# Altium PCB KUOZHAN.PCBDOC (part 7 of 21)
Units mm, origin at the board's own origin, x right, y up, seen from the top; angles counter-clockwise.
Board outline 165.51 x 116.38 mm, 2 copper layers (Top Layer, Bottom Layer); 171 components, 245 nets, 894 pads, 298 vias.
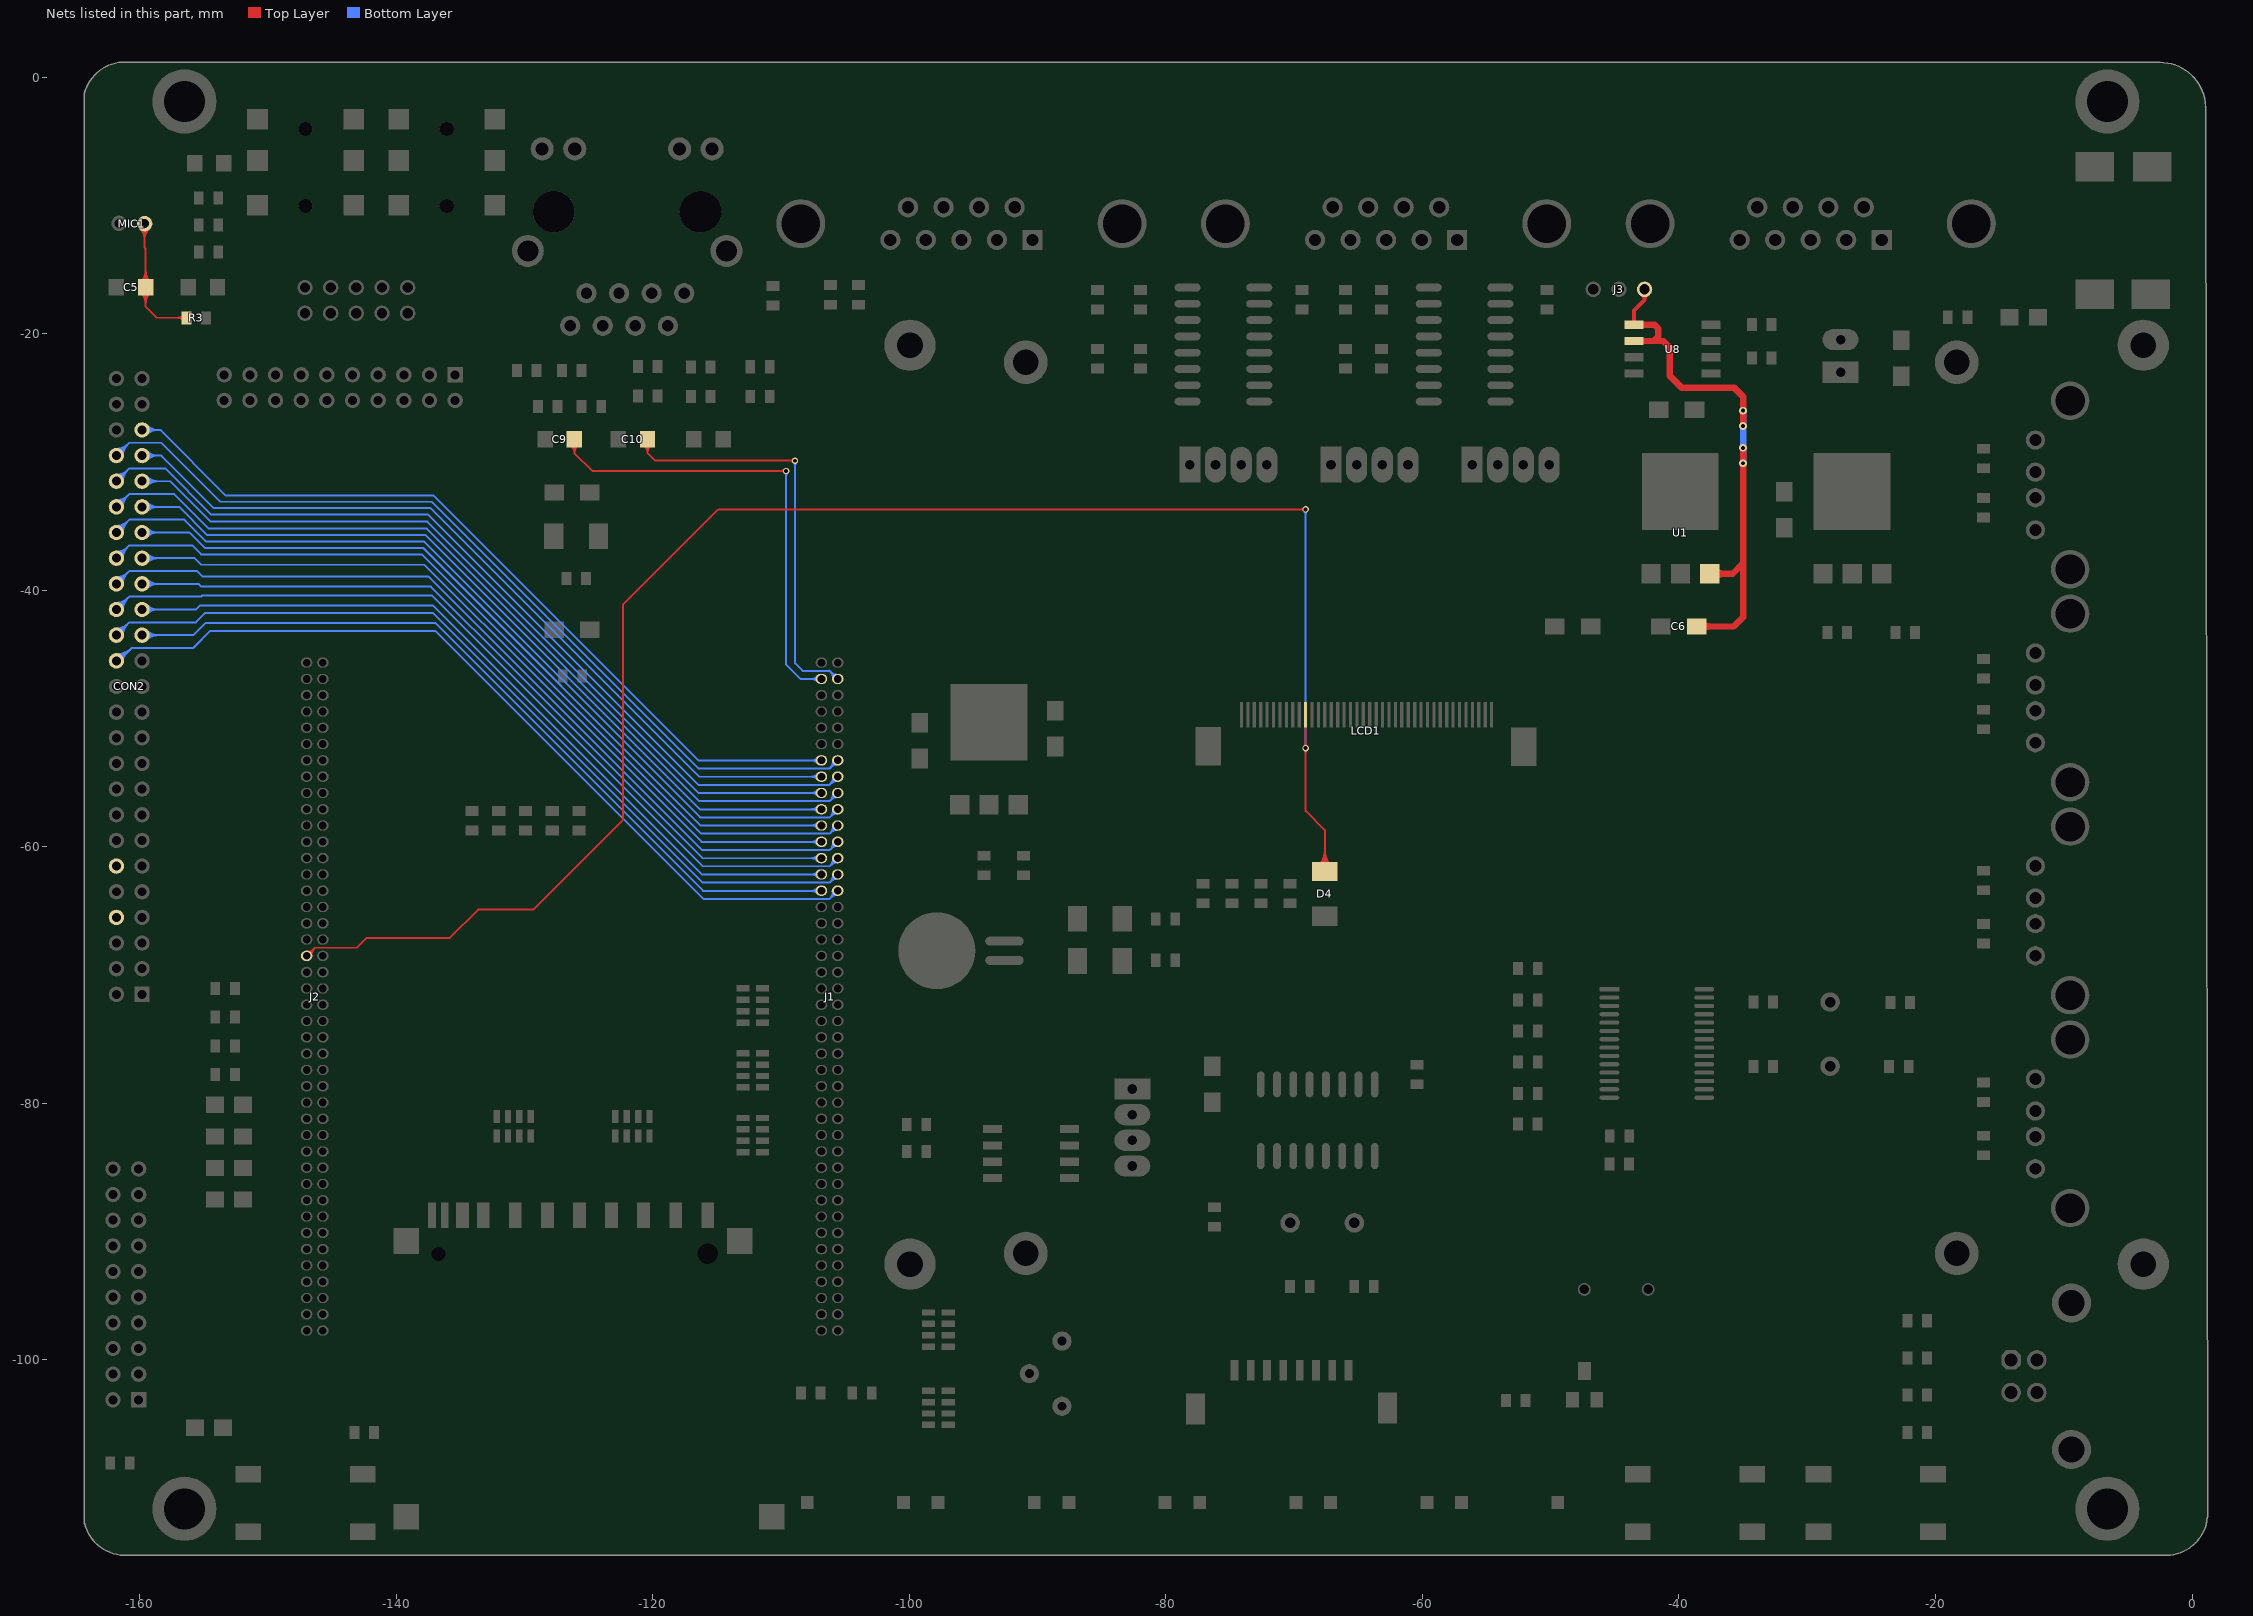
[diagram p7: the nets of this part, all layers, seen from the top]

## Via types
v1: diameter 0.5, hole 0.3, Top Layer to Bottom Layer, 272 vias
v2: diameter 0.6, hole 0.3, Top Layer to Bottom Layer, 24 vias
v3: diameter 0.9, hole 0.9, Top Layer to Bottom Layer, 2 vias

## Nets (pads, with @x,y where several pads share a name; then routed paths per layer and width w, separated by ;. In a path a pad name is that pad's centre, name@x,y a point inside that pad or via, vN(x,y) a via of type N, cw(c..) or ccw(c..) an arc to the next point about the centre after c; other vN are vias at no path point) (continued)
LCD_PWR: D4.1 J2.37 LCD1.30 | length 161.7
  Top Layer w0.15: J2.37@-146.973,-68.514 -146.327,-67.868 -143.068,-67.868 -142.3,-67.1 -135.8,-67.1 -133.6,-64.9 -129.3,-64.9 -122.3,-57.9 -122.3,-41.1 -114.9,-33.7 v1(-69.1,-33.7) ; v1@-69.224,-52.424 cw(c-69.522,-52.722) -69.1,-52.722 cw(c-68.678,-52.722) v1@-68.976,-52.424 ; v1@-69.188,-52.212 ccw(c-69.402,-51.998) -69.1,-51.998 ccw(c-68.798,-51.998) v1@-69.012,-52.212 ; v1@-69.188,-33.788 ccw(c-69.402,-34.002) -69.402,-33.7 ccw(c-69.402,-33.398) v1@-69.188,-33.612 ; LCD1.30@-69.1,-49.7 v1(-69.1,-52.3) -69.1,-57.2 -67.599,-58.701 D4.1@-67.599,-61.915 ; D4.1@-68.077,-61.437 ccw(c-69.229,-60.285) -67.599,-60.285 ccw(c-65.97,-60.285) D4.1@-67.122,-61.437 ; D4.1@-67.971,-61.543 ccw(c-68.867,-60.647) -67.599,-60.647 ccw(c-66.332,-60.647) D4.1@-67.228,-61.543 ; D4.1@-67.865,-61.649 ccw(c-68.505,-61.009) -67.599,-61.009 ccw(c-66.694,-61.009) D4.1@-67.334,-61.649 ; J2.37@-146.973,-68.339 ccw(c-146.973,-67.917) J2.37@-146.674,-68.215 ; J2.37@-146.973,-68.339 ccw(c-146.973,-67.917) J2.37@-146.674,-68.215 ; J2.37@-146.973,-68.339 ccw(c-146.973,-67.917) J2.37@-146.674,-68.215 ; J2.37@-146.973,-68.189 ccw(c-146.973,-67.405) -146.418,-67.959 ; J2.37@-146.973,-68.189 ccw(c-146.973,-67.405) -146.418,-67.959 ; J2.37@-146.973,-68.189 ccw(c-146.973,-67.405) -146.418,-67.959 ; J2.37@-146.798,-68.514 cw(c-146.375,-68.514) J2.37@-146.674,-68.215 ; J2.37@-146.798,-68.514 cw(c-146.375,-68.514) J2.37@-146.674,-68.215 ; J2.37@-146.798,-68.514 cw(c-146.375,-68.514) J2.37@-146.674,-68.215 ; J2.37@-146.648,-68.514 cw(c-145.863,-68.514) -146.418,-67.959 ; J2.37@-146.648,-68.514 cw(c-145.863,-68.514) -146.418,-67.959 ; J2.37@-146.648,-68.514 cw(c-145.863,-68.514) -146.418,-67.959 ; -69.522,-33.7 cw(c-69.522,-34.122) v1@-69.224,-33.824 ; -69.522,-33.7 ccw(c-69.522,-33.278) v1@-69.224,-33.576 ; -69.522,-33.7 cw(c-69.522,-34.122) v1@-69.224,-33.824 ; -69.522,-33.7 ccw(c-69.522,-33.278) v1@-69.224,-33.576 ; -69.522,-33.7 cw(c-69.522,-34.122) v1@-69.224,-33.824 ; -69.522,-33.7 ccw(c-69.522,-33.278) v1@-69.224,-33.576 ; -69.522,-33.7 ccw(c-69.522,-33.278) v1@-69.224,-33.576 ; -69.522,-33.7 cw(c-69.522,-34.122) v1@-69.224,-33.824 ; v1@-69.224,-52.176 ccw(c-69.522,-51.878) -69.1,-51.878 ; v1@-69.224,-52.176 ccw(c-69.522,-51.878) -69.1,-51.878 ; v1@-69.224,-52.176 ccw(c-69.522,-51.878) -69.1,-51.878 ; v1@-69.224,-52.176 ccw(c-69.522,-51.878) -69.1,-51.878 ; -69.1,-51.878 ccw(c-68.678,-51.878) v1@-68.976,-52.176 ; -69.1,-51.878 ccw(c-68.678,-51.878) v1@-68.976,-52.176 ; -69.1,-51.878 ccw(c-68.678,-51.878) v1@-68.976,-52.176 ; -69.1,-51.878 ccw(c-68.678,-51.878) v1@-68.976,-52.176 ; J2.37@-146.923,-68.174 ccw(c-146.923,-67.475) -146.428,-67.969 cw(c-146.923,-67.475) J2.37@-146.923,-68.174 ; J2.37@-146.748,-68.499 cw(c-146.24,-68.499) -146.599,-68.141 ccw(c-146.24,-68.499) J2.37@-146.748,-68.499 ; J2.37@-146.598,-68.499 cw(c-145.728,-68.499) -146.343,-67.885 ccw(c-145.728,-68.499) J2.37@-146.598,-68.499
  Bottom Layer w0.15: v1@-69.188,-52.212 ccw(c-69.402,-51.998) -69.1,-51.998 ccw(c-68.798,-51.998) v1@-69.012,-52.212 ; v1@-69.188,-33.788 cw(c-69.402,-34.002) -69.1,-34.002 cw(c-68.798,-34.002) v1@-69.012,-33.788 ; v1(-69.1,-52.3) v1(-69.1,-33.7) ; v1@-69.224,-52.176 ccw(c-69.522,-51.878) -69.1,-51.878 ; v1@-69.224,-52.176 ccw(c-69.522,-51.878) -69.1,-51.878 ; v1@-69.224,-52.176 ccw(c-69.522,-51.878) -69.1,-51.878 ; v1@-69.224,-52.176 ccw(c-69.522,-51.878) -69.1,-51.878 ; v1@-69.224,-33.824 cw(c-69.522,-34.122) -69.1,-34.122 ; v1@-69.224,-33.824 cw(c-69.522,-34.122) -69.1,-34.122 ; v1@-69.224,-33.824 cw(c-69.522,-34.122) -69.1,-34.122 ; v1@-69.224,-33.824 cw(c-69.522,-34.122) -69.1,-34.122 ; -69.1,-51.878 ccw(c-68.678,-51.878) v1@-68.976,-52.176 ; -69.1,-51.878 ccw(c-68.678,-51.878) v1@-68.976,-52.176 ; -69.1,-51.878 ccw(c-68.678,-51.878) v1@-68.976,-52.176 ; -69.1,-51.878 ccw(c-68.678,-51.878) v1@-68.976,-52.176 ; -69.1,-34.122 cw(c-68.678,-34.122) v1@-68.976,-33.824 ; -69.1,-34.122 cw(c-68.678,-34.122) v1@-68.976,-33.824 ; -69.1,-34.122 cw(c-68.678,-34.122) v1@-68.976,-33.824 ; -69.1,-34.122 cw(c-68.678,-34.122) v1@-68.976,-33.824
LCD_VDD5V: C6.1 J3.3 U1.1 U8.5 U8.6 | length 69.6
  Top Layer w0.3: U8.5@-43.498,-19.302 -43.498,-18.198 -42.677,-17.377 ; J3.3@-42.677,-16.545 -42.677,-17.377 ; U8.5@-43.617,-19.183 ccw(c-43.903,-18.897) -43.498,-18.897 ; U8.5@-43.617,-19.183 ccw(c-43.903,-18.897) -43.498,-18.897 ; U8.5@-43.617,-19.183 ccw(c-43.903,-18.897) -43.498,-18.897 ; U8.5@-43.617,-19.183 ccw(c-43.903,-18.897) -43.498,-18.897 ; U8.5@-43.617,-19.183 ccw(c-43.903,-18.897) -43.498,-18.897 ; -43.498,-18.897 ccw(c-43.094,-18.897) U8.5@-43.38,-19.183 ; -43.498,-18.897 ccw(c-43.094,-18.897) U8.5@-43.38,-19.183 ; -43.498,-18.897 ccw(c-43.094,-18.897) U8.5@-43.38,-19.183 ; -43.498,-18.897 ccw(c-43.094,-18.897) U8.5@-43.38,-19.183 ; -43.498,-18.897 ccw(c-43.094,-18.897) U8.5@-43.38,-19.183 ; J3.3@-42.923,-16.922 cw(c-43.219,-17.377) -42.677,-17.377 ; J3.3@-42.923,-16.922 cw(c-43.219,-17.377) -42.677,-17.377 ; J3.3@-42.923,-16.922 cw(c-43.219,-17.377) -42.677,-17.377 ; J3.3@-42.923,-16.922 cw(c-43.219,-17.377) -42.677,-17.377 ; J3.3@-42.923,-16.922 cw(c-43.219,-17.377) -42.677,-17.377 ; -42.677,-17.377 cw(c-42.134,-17.377) J3.3@-42.431,-16.922 ; -42.677,-17.377 cw(c-42.134,-17.377) J3.3@-42.431,-16.922 ; -42.677,-17.377 cw(c-42.134,-17.377) J3.3@-42.431,-16.922 ; -42.677,-17.377 cw(c-42.134,-17.377) J3.3@-42.431,-16.922 ; -42.677,-17.377 cw(c-42.134,-17.377) J3.3@-42.431,-16.922
  Top Layer w0.5: U8.6@-43.498,-20.572 -41.972,-20.572 ; U8.5@-43.498,-19.302 -41.898,-19.302 -41.6,-19.6 -41.6,-20.2 -41.972,-20.572 ; C6.1@-38.62,-42.821 -35.721,-42.821 -35,-42.1 -35,-37.9 ; U1.1@-37.597,-38.712 -35.812,-38.712 -35,-37.9 ; v2(-35,-28.9) v2(-35,-30.1) -35,-37.9 ; v2(-35,-27.2) v2(-35,-26) -35,-24.9 -35.7,-24.2 -39.8,-24.2 -40.7,-23.3 -40.7,-21.1 -41.228,-20.572 -41.972,-20.572 ; C6.1@-38.221,-43.093 cw(c-37.564,-43.75) -37.564,-42.821 ; C6.1@-38.221,-43.093 cw(c-37.564,-43.75) -37.564,-42.821 ; C6.1@-38.221,-43.093 cw(c-37.564,-43.75) -37.564,-42.821 ; C6.1@-38.221,-43.093 cw(c-37.564,-43.75) -37.564,-42.821 ; C6.1@-38.221,-43.093 cw(c-37.564,-43.75) -37.564,-42.821 ; C6.1@-38.221,-42.549 ccw(c-37.564,-41.891) -37.564,-42.821 ; C6.1@-38.221,-42.549 ccw(c-37.564,-41.891) -37.564,-42.821 ; C6.1@-38.221,-42.549 ccw(c-37.564,-41.891) -37.564,-42.821 ; C6.1@-38.221,-42.549 ccw(c-37.564,-41.891) -37.564,-42.821 ; C6.1@-38.221,-42.549 ccw(c-37.564,-41.891) -37.564,-42.821 ; U1.1@-37.243,-39.066 cw(c-36.39,-39.919) -36.39,-38.712 ; U1.1@-37.243,-39.066 cw(c-36.39,-39.919) -36.39,-38.712 ; U1.1@-37.243,-39.066 cw(c-36.39,-39.919) -36.39,-38.712 ; U1.1@-37.243,-39.066 cw(c-36.39,-39.919) -36.39,-38.712 ; U1.1@-37.243,-39.066 cw(c-36.39,-39.919) -36.39,-38.712 ; U1.1@-37.243,-38.358 ccw(c-36.39,-37.505) -36.39,-38.712 ; U1.1@-37.243,-38.358 ccw(c-36.39,-37.505) -36.39,-38.712 ; U1.1@-37.243,-38.358 ccw(c-36.39,-37.505) -36.39,-38.712 ; U1.1@-37.243,-38.358 ccw(c-36.39,-37.505) -36.39,-38.712 ; U1.1@-37.243,-38.358 ccw(c-36.39,-37.505) -36.39,-38.712
  Bottom Layer w0.5: v2(-35,-30.1) v2(-35,-28.9) v2(-35,-27.2) v2(-35,-26)
LDATA0: CON2.42 J1.16 | length 83.6
  Bottom Layer w0.15: CON2.42@-161.8,-31.5 -160.8,-30.5 -158,-30.5 -154.4,-34.1 -137.5,-34.1 -116.42,-55.18 ; CON2.42@-161.8,-31.125 ccw(c-161.8,-30.22) -161.16,-30.86 ccw(c-160.52,-31.5) CON2.42@-161.425,-31.5 ; CON2.42@-161.8,-30.975 ccw(c-161.8,-29.708) -160.904,-30.604 ccw(c-160.008,-31.5) CON2.42@-161.275,-31.5 ; -116.414,-55.174 -106.216,-55.174 J1.16@-105.571,-54.529 ; -106.217,-55.18 J1.16@-105.571,-54.535 ; -106.126,-55.089 cw(c-105.571,-55.644) J1.16@-105.571,-54.86 ; -106.126,-55.089 ccw(c-106.68,-54.535) J1.16@-105.896,-54.535 ; -106.126,-55.089 cw(c-105.571,-55.644) J1.16@-105.571,-54.86 ; -106.126,-55.089 ccw(c-106.68,-54.535) J1.16@-105.896,-54.535 ; -106.126,-55.089 cw(c-105.571,-55.644) J1.16@-105.571,-54.86 ; -106.126,-55.089 ccw(c-106.68,-54.535) J1.16@-105.896,-54.535 ; J1.16@-105.87,-54.833 cw(c-105.571,-55.132) J1.16@-105.571,-54.71 ; J1.16@-105.87,-54.833 ccw(c-106.168,-54.535) J1.16@-105.746,-54.535 ; J1.16@-105.87,-54.833 cw(c-105.571,-55.132) J1.16@-105.571,-54.71 ; J1.16@-105.87,-54.833 ccw(c-106.168,-54.535) J1.16@-105.746,-54.535 ; J1.16@-105.87,-54.833 cw(c-105.571,-55.132) J1.16@-105.571,-54.71 ; J1.16@-105.87,-54.833 ccw(c-106.168,-54.535) J1.16@-105.746,-54.535 ; J1.16@-105.796,-54.535 cw(c-106.301,-54.55) -105.944,-54.907 ccw(c-106.301,-54.55) J1.16@-105.796,-54.535 ; J1.16@-105.796,-54.534 cw(c-106.299,-54.546) -105.943,-54.902 ccw(c-106.299,-54.546) J1.16@-105.796,-54.534 ; J1.16@-105.621,-54.854 ccw(c-105.621,-55.506) -106.081,-55.045 cw(c-105.621,-55.506) J1.16@-105.621,-54.854 ; J1.16@-105.621,-54.854 ccw(c-105.621,-55.518) -106.09,-55.049 cw(c-105.621,-55.518) J1.16@-105.621,-54.854 ; -106.191,-55.149 ccw(c-106.783,-54.557) -105.946,-54.537 cw(c-106.783,-54.557) -106.191,-55.149 ; -106.189,-55.153 ccw(c-106.778,-54.564) -105.946,-54.539 cw(c-106.778,-54.564) -106.189,-55.153
LDATA1: CON2.43 J1.15 | length 76.2
  Bottom Layer w0.15: CON2.43@-159.8,-29.5 -158.3,-29.5 -154.2,-33.6 -137.3,-33.6 -116.365,-54.535 J1.15@-106.841,-54.535 ; CON2.43@-159.535,-29.765 cw(c-158.895,-30.405) -158.895,-29.5 cw(c-158.895,-28.595) CON2.43@-159.535,-29.235 ; CON2.43@-159.429,-29.871 cw(c-158.533,-30.767) -158.533,-29.5 cw(c-158.533,-28.233) CON2.43@-159.429,-29.129 ; -107.625,-54.535 cw(c-107.625,-55.319) J1.15@-107.071,-54.764 ; -107.625,-54.535 ccw(c-107.625,-53.75) J1.15@-107.071,-54.305 ; -107.625,-54.535 cw(c-107.625,-55.319) J1.15@-107.071,-54.764 ; -107.625,-54.535 ccw(c-107.625,-53.75) J1.15@-107.071,-54.305 ; -107.625,-54.535 cw(c-107.625,-55.319) J1.15@-107.071,-54.764 ; -107.625,-54.535 ccw(c-107.625,-53.75) J1.15@-107.071,-54.305 ; J1.15@-107.263,-54.535 cw(c-107.263,-54.957) J1.15@-106.965,-54.658 ; J1.15@-107.263,-54.535 ccw(c-107.263,-54.112) J1.15@-106.965,-54.411 ; J1.15@-107.263,-54.535 cw(c-107.263,-54.957) J1.15@-106.965,-54.658 ; J1.15@-107.263,-54.535 ccw(c-107.263,-54.112) J1.15@-106.965,-54.411 ; J1.15@-107.263,-54.535 cw(c-107.263,-54.957) J1.15@-106.965,-54.658 ; J1.15@-107.263,-54.535 ccw(c-107.263,-54.112) J1.15@-106.965,-54.411 ; -107.688,-54.535 ccw(c-107.688,-53.732) -107.121,-54.3 cw(c-107.688,-53.732) -107.688,-54.535 ; -107.663,-54.535 cw(c-107.663,-55.302) -107.121,-54.759 ccw(c-107.663,-55.302) -107.663,-54.535 ; -107.326,-54.535 ccw(c-107.326,-54.094) -107.015,-54.406 cw(c-107.326,-54.094) -107.326,-54.535 ; -107.301,-54.535 cw(c-107.301,-54.939) -107.015,-54.653 ccw(c-107.301,-54.939) -107.301,-54.535
LDATA2: CON2.40 J1.18 | length 79
  Bottom Layer w0.15: CON2.40@-161.8,-33.5 -160.8,-32.5 -157.3,-32.5 -154.6,-35.2 -137.6,-35.2 -116.37,-56.43 -106.196,-56.43 J1.18@-105.571,-55.805 ; CON2.40@-161.8,-33.125 ccw(c-161.8,-32.22) -161.16,-32.86 ccw(c-160.52,-33.5) CON2.40@-161.425,-33.5 ; CON2.40@-161.8,-32.975 ccw(c-161.8,-31.708) -160.904,-32.604 ccw(c-160.008,-33.5) CON2.40@-161.275,-33.5 ; -106.126,-56.36 cw(c-105.571,-56.915) J1.18@-105.571,-56.13 ; -106.126,-56.36 ccw(c-106.68,-55.805) J1.18@-105.896,-55.805 ; -106.126,-56.36 cw(c-105.571,-56.915) J1.18@-105.571,-56.13 ; -106.126,-56.36 ccw(c-106.68,-55.805) J1.18@-105.896,-55.805 ; -106.126,-56.36 cw(c-105.571,-56.915) J1.18@-105.571,-56.13 ; -106.126,-56.36 ccw(c-106.68,-55.805) J1.18@-105.896,-55.805 ; J1.18@-105.87,-56.104 cw(c-105.571,-56.403) J1.18@-105.571,-55.98 ; J1.18@-105.87,-56.104 ccw(c-106.168,-55.805) J1.18@-105.746,-55.805 ; J1.18@-105.87,-56.104 cw(c-105.571,-56.403) J1.18@-105.571,-55.98 ; J1.18@-105.87,-56.104 ccw(c-106.168,-55.805) J1.18@-105.746,-55.805 ; J1.18@-105.87,-56.104 cw(c-105.571,-56.403) J1.18@-105.571,-55.98 ; J1.18@-105.87,-56.104 ccw(c-106.168,-55.805) J1.18@-105.746,-55.805 ; -106.168,-56.402 ccw(c-106.708,-55.862) -105.945,-55.818 cw(c-106.708,-55.862) -106.168,-56.402 ; -106.08,-56.315 cw(c-105.621,-56.774) -105.621,-56.124 ccw(c-105.621,-56.774) -106.08,-56.315 ; -105.931,-56.166 ccw(c-106.261,-55.836) -105.796,-55.809 cw(c-106.261,-55.836) -105.931,-56.166
LDATA3: CON2.41 J1.17 | length 75.9
  Bottom Layer w0.15: CON2.41@-159.8,-31.5 -157.6,-31.5 -154.454,-34.646 -137.554,-34.646 -116.395,-55.805 J1.17@-106.841,-55.805 ; CON2.41@-159.535,-31.765 cw(c-158.895,-32.405) -158.895,-31.5 cw(c-158.895,-30.595) CON2.41@-159.535,-31.235 ; CON2.41@-159.429,-31.871 cw(c-158.533,-32.767) -158.533,-31.5 cw(c-158.533,-30.233) CON2.41@-159.429,-31.129 ; -107.625,-55.805 cw(c-107.625,-56.59) J1.17@-107.071,-56.035 ; -107.625,-55.805 ccw(c-107.625,-55.021) J1.17@-107.071,-55.576 ; -107.625,-55.805 cw(c-107.625,-56.59) J1.17@-107.071,-56.035 ; -107.625,-55.805 ccw(c-107.625,-55.021) J1.17@-107.071,-55.576 ; -107.625,-55.805 cw(c-107.625,-56.59) J1.17@-107.071,-56.035 ; -107.625,-55.805 ccw(c-107.625,-55.021) J1.17@-107.071,-55.576 ; J1.17@-107.263,-55.805 cw(c-107.263,-56.228) J1.17@-106.965,-55.929 ; J1.17@-107.263,-55.805 ccw(c-107.263,-55.383) J1.17@-106.965,-55.682 ; J1.17@-107.263,-55.805 cw(c-107.263,-56.228) J1.17@-106.965,-55.929 ; J1.17@-107.263,-55.805 ccw(c-107.263,-55.383) J1.17@-106.965,-55.682 ; J1.17@-107.263,-55.805 cw(c-107.263,-56.228) J1.17@-106.965,-55.929 ; J1.17@-107.263,-55.805 ccw(c-107.263,-55.383) J1.17@-106.965,-55.682 ; -107.69,-55.805 ccw(c-107.69,-55) -107.121,-55.57 cw(c-107.69,-55) -107.69,-55.805 ; -107.661,-55.805 cw(c-107.661,-56.569) -107.121,-56.029 ccw(c-107.661,-56.569) -107.661,-55.805 ; -107.328,-55.805 ccw(c-107.328,-55.362) -107.015,-55.676 cw(c-107.328,-55.362) -107.328,-55.805 ; -107.299,-55.805 cw(c-107.299,-56.207) -107.015,-55.923 ccw(c-107.299,-56.207) -107.299,-55.805
LDATA4: CON2.38 J1.20 | length 78.7
  Bottom Layer w0.15: CON2.38@-161.8,-35.5 -160.8,-34.5 -156.5,-34.5 -154.8,-36.2 -137.8,-36.2 -116.299,-57.701 -106.196,-57.701 J1.20@-105.571,-57.076 ; CON2.38@-161.8,-35.125 ccw(c-161.8,-34.22) -161.16,-34.86 ccw(c-160.52,-35.5) CON2.38@-161.425,-35.5 ; CON2.38@-161.8,-34.975 ccw(c-161.8,-33.708) -160.904,-34.604 ccw(c-160.008,-35.5) CON2.38@-161.275,-35.5 ; -106.126,-57.631 cw(c-105.571,-58.186) J1.20@-105.571,-57.401 ; -106.126,-57.631 ccw(c-106.68,-57.076) J1.20@-105.896,-57.076 ; -106.126,-57.631 cw(c-105.571,-58.186) J1.20@-105.571,-57.401 ; -106.126,-57.631 ccw(c-106.68,-57.076) J1.20@-105.896,-57.076 ; -106.126,-57.631 cw(c-105.571,-58.186) J1.20@-105.571,-57.401 ; -106.126,-57.631 ccw(c-106.68,-57.076) J1.20@-105.896,-57.076 ; J1.20@-105.87,-57.375 cw(c-105.571,-57.674) J1.20@-105.571,-57.251 ; J1.20@-105.87,-57.375 ccw(c-106.168,-57.076) J1.20@-105.746,-57.076 ; J1.20@-105.87,-57.375 cw(c-105.571,-57.674) J1.20@-105.571,-57.251 ; J1.20@-105.87,-57.375 ccw(c-106.168,-57.076) J1.20@-105.746,-57.076 ; J1.20@-105.87,-57.375 cw(c-105.571,-57.674) J1.20@-105.571,-57.251 ; J1.20@-105.87,-57.375 ccw(c-106.168,-57.076) J1.20@-105.746,-57.076 ; -106.167,-57.673 ccw(c-106.707,-57.133) -105.945,-57.089 cw(c-106.707,-57.133) -106.167,-57.673 ; -106.078,-57.584 cw(c-105.621,-58.042) -105.621,-57.394 ccw(c-105.621,-58.042) -106.078,-57.584 ; -105.931,-57.437 ccw(c-106.261,-57.107) -105.795,-57.08 cw(c-106.261,-57.107) -105.931,-57.437
LDATA5: CON2.39 J1.19 | length 75.6
  Bottom Layer w0.15: CON2.39@-159.8,-33.5 -156.9,-33.5 -154.7,-35.7 -137.7,-35.7 -116.324,-57.076 J1.19@-106.841,-57.076 ; CON2.39@-159.535,-33.765 cw(c-158.895,-34.405) -158.895,-33.5 cw(c-158.895,-32.595) CON2.39@-159.535,-33.235 ; CON2.39@-159.429,-33.871 cw(c-158.533,-34.767) -158.533,-33.5 cw(c-158.533,-32.233) CON2.39@-159.429,-33.129 ; -107.625,-57.076 cw(c-107.625,-57.861) J1.19@-107.071,-57.306 ; -107.625,-57.076 ccw(c-107.625,-56.292) J1.19@-107.071,-56.846 ; -107.625,-57.076 cw(c-107.625,-57.861) J1.19@-107.071,-57.306 ; -107.625,-57.076 ccw(c-107.625,-56.292) J1.19@-107.071,-56.846 ; -107.625,-57.076 cw(c-107.625,-57.861) J1.19@-107.071,-57.306 ; -107.625,-57.076 ccw(c-107.625,-56.292) J1.19@-107.071,-56.846 ; J1.19@-107.263,-57.076 cw(c-107.263,-57.499) J1.19@-106.965,-57.2 ; J1.19@-107.263,-57.076 ccw(c-107.263,-56.654) J1.19@-106.965,-56.953 ; J1.19@-107.263,-57.076 cw(c-107.263,-57.499) J1.19@-106.965,-57.2 ; J1.19@-107.263,-57.076 ccw(c-107.263,-56.654) J1.19@-106.965,-56.953 ; J1.19@-107.263,-57.076 cw(c-107.263,-57.499) J1.19@-106.965,-57.2 ; J1.19@-107.263,-57.076 ccw(c-107.263,-56.654) J1.19@-106.965,-56.953 ; -107.692,-57.076 ccw(c-107.692,-56.268) -107.121,-56.84 cw(c-107.692,-56.268) -107.692,-57.076 ; -107.659,-57.076 cw(c-107.659,-57.837) -107.121,-57.299 ccw(c-107.659,-57.837) -107.659,-57.076 ; -107.33,-57.076 ccw(c-107.33,-56.63) -107.015,-56.946 cw(c-107.33,-56.63) -107.33,-57.076 ; -107.297,-57.076 cw(c-107.297,-57.475) -107.015,-57.193 ccw(c-107.297,-57.475) -107.297,-57.076
LDATA6: CON2.36 J1.22 | length 78.4
  Bottom Layer w0.15: CON2.36@-161.8,-37.5 -160.8,-36.5 -155.9,-36.5 -155.195,-37.205 -137.995,-37.205 -116.228,-58.972 -106.196,-58.972 J1.22@-105.571,-58.347 ; CON2.36@-161.8,-37.125 ccw(c-161.8,-36.22) -161.16,-36.86 ccw(c-160.52,-37.5) CON2.36@-161.425,-37.5 ; CON2.36@-161.8,-36.975 ccw(c-161.8,-35.708) -160.904,-36.604 ccw(c-160.008,-37.5) CON2.36@-161.275,-37.5 ; -106.126,-58.902 cw(c-105.571,-59.457) J1.22@-105.571,-58.672 ; -106.126,-58.902 ccw(c-106.68,-58.347) J1.22@-105.896,-58.347 ; -106.126,-58.902 cw(c-105.571,-59.457) J1.22@-105.571,-58.672 ; -106.126,-58.902 ccw(c-106.68,-58.347) J1.22@-105.896,-58.347 ; -106.126,-58.902 cw(c-105.571,-59.457) J1.22@-105.571,-58.672 ; -106.126,-58.902 ccw(c-106.68,-58.347) J1.22@-105.896,-58.347 ; J1.22@-105.87,-58.646 cw(c-105.571,-58.945) J1.22@-105.571,-58.522 ; J1.22@-105.87,-58.646 ccw(c-106.168,-58.347) J1.22@-105.746,-58.347 ; J1.22@-105.87,-58.646 cw(c-105.571,-58.945) J1.22@-105.571,-58.522 ; J1.22@-105.87,-58.646 ccw(c-106.168,-58.347) J1.22@-105.746,-58.347 ; J1.22@-105.87,-58.646 cw(c-105.571,-58.945) J1.22@-105.571,-58.522 ; J1.22@-105.87,-58.646 ccw(c-106.168,-58.347) J1.22@-105.746,-58.347 ; -106.167,-58.943 ccw(c-106.705,-58.405) -105.945,-58.359 cw(c-106.705,-58.405) -106.167,-58.943 ; -106.077,-58.853 cw(c-105.621,-59.309) -105.621,-58.664 ccw(c-105.621,-59.309) -106.077,-58.853 ; -105.931,-58.708 ccw(c-106.261,-58.378) -105.795,-58.35 cw(c-106.261,-58.378) -105.931,-58.708
LDATA7: CON2.37 J1.21 | length 75.3
  Bottom Layer w0.15: CON2.37@-159.8,-35.5 -156.1,-35.5 -154.9,-36.7 -137.9,-36.7 -116.253,-58.347 J1.21@-106.841,-58.347 ; CON2.37@-159.535,-35.765 cw(c-158.895,-36.405) -158.895,-35.5 cw(c-158.895,-34.595) CON2.37@-159.535,-35.235 ; CON2.37@-159.429,-35.871 cw(c-158.533,-36.767) -158.533,-35.5 cw(c-158.533,-34.233) CON2.37@-159.429,-35.129 ; -107.625,-58.347 cw(c-107.625,-59.132) J1.21@-107.071,-58.577 ; -107.625,-58.347 ccw(c-107.625,-57.563) J1.21@-107.071,-58.117 ; -107.625,-58.347 cw(c-107.625,-59.132) J1.21@-107.071,-58.577 ; -107.625,-58.347 ccw(c-107.625,-57.563) J1.21@-107.071,-58.117 ; -107.625,-58.347 cw(c-107.625,-59.132) J1.21@-107.071,-58.577 ; -107.625,-58.347 ccw(c-107.625,-57.563) J1.21@-107.071,-58.117 ; J1.21@-107.263,-58.347 cw(c-107.263,-58.77) J1.21@-106.965,-58.471 ; J1.21@-107.263,-58.347 ccw(c-107.263,-57.925) J1.21@-106.965,-58.223 ; J1.21@-107.263,-58.347 cw(c-107.263,-58.77) J1.21@-106.965,-58.471 ; J1.21@-107.263,-58.347 ccw(c-107.263,-57.925) J1.21@-106.965,-58.223 ; J1.21@-107.263,-58.347 cw(c-107.263,-58.77) J1.21@-106.965,-58.471 ; J1.21@-107.263,-58.347 ccw(c-107.263,-57.925) J1.21@-106.965,-58.223 ; -107.694,-58.347 ccw(c-107.694,-57.536) -107.121,-58.11 cw(c-107.694,-57.536) -107.694,-58.347 ; -107.657,-58.347 cw(c-107.657,-59.105) -107.121,-58.569 ccw(c-107.657,-59.105) -107.657,-58.347 ; -107.332,-58.347 ccw(c-107.332,-57.898) -107.015,-58.216 cw(c-107.332,-57.898) -107.332,-58.347 ; -107.294,-58.347 cw(c-107.294,-58.743) -107.015,-58.463 ccw(c-107.294,-58.743) -107.294,-58.347
LDATA8: CON2.34 J1.24 | length 78.1
  Bottom Layer w0.15: CON2.34@-161.8,-39.5 -160.8,-38.5 -155.5,-38.5 -155.069,-38.931 -137.469,-38.931 -129.757,-46.643 -116.157,-60.243 -106.196,-60.243 J1.24@-105.571,-59.618 ; CON2.34@-161.8,-39.125 ccw(c-161.8,-38.22) -161.16,-38.86 ccw(c-160.52,-39.5) CON2.34@-161.425,-39.5 ; CON2.34@-161.8,-38.975 ccw(c-161.8,-37.708) -160.904,-38.604 ccw(c-160.008,-39.5) CON2.34@-161.275,-39.5 ; -106.126,-60.173 cw(c-105.571,-60.728) J1.24@-105.571,-59.943 ; -106.126,-60.173 ccw(c-106.68,-59.618) J1.24@-105.896,-59.618 ; -106.126,-60.173 cw(c-105.571,-60.728) J1.24@-105.571,-59.943 ; -106.126,-60.173 ccw(c-106.68,-59.618) J1.24@-105.896,-59.618 ; -106.126,-60.173 cw(c-105.571,-60.728) J1.24@-105.571,-59.943 ; -106.126,-60.173 ccw(c-106.68,-59.618) J1.24@-105.896,-59.618 ; J1.24@-105.87,-59.917 cw(c-105.571,-60.216) J1.24@-105.571,-59.793 ; J1.24@-105.87,-59.917 ccw(c-106.168,-59.618) J1.24@-105.746,-59.618 ; J1.24@-105.87,-59.917 cw(c-105.571,-60.216) J1.24@-105.571,-59.793 ; J1.24@-105.87,-59.917 ccw(c-106.168,-59.618) J1.24@-105.746,-59.618 ; J1.24@-105.87,-59.917 cw(c-105.571,-60.216) J1.24@-105.571,-59.793 ; J1.24@-105.87,-59.917 ccw(c-106.168,-59.618) J1.24@-105.746,-59.618 ; -106.166,-60.214 ccw(c-106.704,-59.676) -105.945,-59.629 cw(c-106.704,-59.676) -106.166,-60.214 ; -106.075,-60.123 cw(c-105.621,-60.577) -105.621,-59.934 ccw(c-105.621,-60.577) -106.075,-60.123 ; -105.931,-59.978 ccw(c-106.261,-59.649) -105.795,-59.62 cw(c-106.261,-59.649) -105.931,-59.978
LDATA9: CON2.35 J1.23 | length 75
  Bottom Layer w0.15: CON2.35@-159.8,-37.5 -155.7,-37.5 -155.188,-38.012 -137.788,-38.012 -128.662,-47.138 -116.182,-59.618 J1.23@-106.841,-59.618 ; CON2.35@-159.535,-37.765 cw(c-158.895,-38.405) -158.895,-37.5 cw(c-158.895,-36.595) CON2.35@-159.535,-37.235 ; CON2.35@-159.429,-37.871 cw(c-158.533,-38.767) -158.533,-37.5 cw(c-158.533,-36.233) CON2.35@-159.429,-37.129 ; -107.625,-59.618 cw(c-107.625,-60.403) J1.23@-107.071,-59.848 ; -107.625,-59.618 ccw(c-107.625,-58.833) J1.23@-107.071,-59.388 ; -107.625,-59.618 cw(c-107.625,-60.403) J1.23@-107.071,-59.848 ; -107.625,-59.618 ccw(c-107.625,-58.833) J1.23@-107.071,-59.388 ; -107.625,-59.618 cw(c-107.625,-60.403) J1.23@-107.071,-59.848 ; -107.625,-59.618 ccw(c-107.625,-58.833) J1.23@-107.071,-59.388 ; J1.23@-107.263,-59.618 cw(c-107.263,-60.041) J1.23@-106.965,-59.742 ; J1.23@-107.263,-59.618 ccw(c-107.263,-59.196) J1.23@-106.965,-59.494 ; J1.23@-107.263,-59.618 cw(c-107.263,-60.041) J1.23@-106.965,-59.742 ; J1.23@-107.263,-59.618 ccw(c-107.263,-59.196) J1.23@-106.965,-59.494 ; J1.23@-107.263,-59.618 cw(c-107.263,-60.041) J1.23@-106.965,-59.742 ; J1.23@-107.263,-59.618 ccw(c-107.263,-59.196) J1.23@-106.965,-59.494 ; -107.696,-59.618 ccw(c-107.696,-58.804) -107.121,-59.38 cw(c-107.696,-58.804) -107.696,-59.618 ; -107.654,-59.618 cw(c-107.654,-60.373) -107.121,-59.839 ccw(c-107.654,-60.373) -107.654,-59.618 ; -107.334,-59.618 ccw(c-107.334,-59.166) -107.015,-59.486 cw(c-107.334,-59.166) -107.334,-59.618 ; -107.292,-59.618 cw(c-107.292,-60.011) -107.015,-59.733 ccw(c-107.292,-60.011) -107.292,-59.618
LDATA10: CON2.32 J1.26 | length 77.9
  Bottom Layer w0.15: CON2.32@-161.8,-41.5 -160.8,-40.5 -155.2,-40.5 -155.116,-40.416 -137.184,-40.416 -131.593,-46.007 -116.086,-61.514 -106.196,-61.514 J1.26@-105.571,-60.889 ; CON2.32@-161.8,-41.125 ccw(c-161.8,-40.22) -161.16,-40.86 ccw(c-160.52,-41.5) CON2.32@-161.425,-41.5 ; CON2.32@-161.8,-40.975 ccw(c-161.8,-39.708) -160.904,-40.604 ccw(c-160.008,-41.5) CON2.32@-161.275,-41.5 ; -106.126,-61.444 cw(c-105.571,-61.999) J1.26@-105.571,-61.214 ; -106.126,-61.444 ccw(c-106.68,-60.889) J1.26@-105.896,-60.889 ; -106.126,-61.444 cw(c-105.571,-61.999) J1.26@-105.571,-61.214 ; -106.126,-61.444 ccw(c-106.68,-60.889) J1.26@-105.896,-60.889 ; -106.126,-61.444 cw(c-105.571,-61.999) J1.26@-105.571,-61.214 ; -106.126,-61.444 ccw(c-106.68,-60.889) J1.26@-105.896,-60.889 ; J1.26@-105.87,-61.188 cw(c-105.571,-61.486) J1.26@-105.571,-61.064 ; J1.26@-105.87,-61.188 ccw(c-106.168,-60.889) J1.26@-105.746,-60.889 ; J1.26@-105.87,-61.188 cw(c-105.571,-61.486) J1.26@-105.571,-61.064 ; J1.26@-105.87,-61.188 ccw(c-106.168,-60.889) J1.26@-105.746,-60.889 ; J1.26@-105.87,-61.188 cw(c-105.571,-61.486) J1.26@-105.571,-61.064 ; J1.26@-105.87,-61.188 ccw(c-106.168,-60.889) J1.26@-105.746,-60.889 ; -106.166,-61.484 ccw(c-106.703,-60.947) -105.945,-60.9 cw(c-106.703,-60.947) -106.166,-61.484 ; -106.074,-61.392 cw(c-105.621,-61.845) -105.621,-61.204 ccw(c-105.621,-61.845) -106.074,-61.392 ; -105.931,-61.249 ccw(c-106.261,-60.92) -105.795,-60.89 cw(c-106.261,-60.92) -105.931,-61.249
LDATA11: CON2.33 J1.25 | length 74.1
  Bottom Layer w0.15: CON2.33@-159.8,-39.5 -155.4,-39.5 -155.191,-39.709 -137.291,-39.709 -130.71,-46.29 -116.111,-60.889 J1.25@-106.841,-60.889 ; CON2.33@-159.535,-39.765 cw(c-158.895,-40.405) -158.895,-39.5 cw(c-158.895,-38.595) CON2.33@-159.535,-39.235 ; CON2.33@-159.429,-39.871 cw(c-158.533,-40.767) -158.533,-39.5 cw(c-158.533,-38.233) CON2.33@-159.429,-39.129 ; -107.625,-60.889 cw(c-107.625,-61.674) J1.25@-107.071,-61.119 ; -107.625,-60.889 ccw(c-107.625,-60.104) J1.25@-107.071,-60.659 ; -107.625,-60.889 cw(c-107.625,-61.674) J1.25@-107.071,-61.119 ; -107.625,-60.889 ccw(c-107.625,-60.104) J1.25@-107.071,-60.659 ; -107.625,-60.889 cw(c-107.625,-61.674) J1.25@-107.071,-61.119 ; -107.625,-60.889 ccw(c-107.625,-60.104) J1.25@-107.071,-60.659 ; J1.25@-107.263,-60.889 cw(c-107.263,-61.311) J1.25@-106.965,-61.013 ; J1.25@-107.263,-60.889 ccw(c-107.263,-60.466) J1.25@-106.965,-60.765 ; J1.25@-107.263,-60.889 cw(c-107.263,-61.311) J1.25@-106.965,-61.013 ; J1.25@-107.263,-60.889 ccw(c-107.263,-60.466) J1.25@-106.965,-60.765 ; J1.25@-107.263,-60.889 cw(c-107.263,-61.311) J1.25@-106.965,-61.013 ; J1.25@-107.263,-60.889 ccw(c-107.263,-60.466) J1.25@-106.965,-60.765 ; -107.699,-60.889 ccw(c-107.699,-60.072) -107.121,-60.65 cw(c-107.699,-60.072) -107.699,-60.889 ; -107.652,-60.889 cw(c-107.652,-61.641) -107.121,-61.109 ccw(c-107.652,-61.641) -107.652,-60.889 ; -107.336,-60.889 ccw(c-107.336,-60.434) -107.015,-60.756 cw(c-107.336,-60.434) -107.336,-60.889
LDATA12: CON2.30 J1.28 | length 80.7
  Bottom Layer w0.15: CON2.30@-161.8,-43.5 -160.8,-42.5 -155.6,-42.5 -154.86,-41.76 -137.14,-41.76 -116.1,-62.8 ; CON2.30@-161.8,-43.125 ccw(c-161.8,-42.22) -161.16,-42.86 ccw(c-160.52,-43.5) CON2.30@-161.425,-43.5 ; CON2.30@-161.8,-42.975 ccw(c-161.8,-41.708) -160.904,-42.604 ccw(c-160.008,-43.5) CON2.30@-161.275,-43.5 ; -116.094,-62.794 -106.216,-62.794 J1.28@-105.571,-62.149 ; -106.211,-62.8 J1.28@-105.571,-62.16 ; -106.191,-62.769 ccw(c-106.783,-62.177) J1.28@-105.946,-62.157 ; -106.09,-62.669 cw(c-105.621,-63.138) J1.28@-105.621,-62.474 ; -105.943,-62.522 ccw(c-106.299,-62.166) J1.28@-105.796,-62.154 ; -106.126,-62.715 cw(c-105.571,-63.269) J1.28@-105.571,-62.485 ; -106.126,-62.715 ccw(c-106.68,-62.16) J1.28@-105.896,-62.16 ; -106.126,-62.715 cw(c-105.571,-63.269) J1.28@-105.571,-62.485 ; -106.126,-62.715 ccw(c-106.68,-62.16) J1.28@-105.896,-62.16 ; -106.126,-62.715 cw(c-105.571,-63.269) J1.28@-105.571,-62.485 ; -106.126,-62.715 ccw(c-106.68,-62.16) J1.28@-105.896,-62.16 ; J1.28@-105.87,-62.459 cw(c-105.571,-62.757) J1.28@-105.571,-62.335 ; J1.28@-105.87,-62.459 ccw(c-106.168,-62.16) J1.28@-105.746,-62.16 ; J1.28@-105.87,-62.459 cw(c-105.571,-62.757) J1.28@-105.571,-62.335 ; J1.28@-105.87,-62.459 ccw(c-106.168,-62.16) J1.28@-105.746,-62.16 ; J1.28@-105.87,-62.459 cw(c-105.571,-62.757) J1.28@-105.571,-62.335 ; J1.28@-105.87,-62.459 ccw(c-106.168,-62.16) J1.28@-105.746,-62.16 ; J1.28@-105.621,-62.474 ccw(c-105.621,-63.113) -106.072,-62.661 cw(c-105.621,-63.113) J1.28@-105.621,-62.474 ; -106.181,-62.77 ccw(c-106.751,-62.2) -105.945,-62.164 cw(c-106.751,-62.2) -106.181,-62.77 ; -105.94,-62.529 ccw(c-106.29,-62.179) -105.796,-62.157 cw(c-106.29,-62.179) -105.94,-62.529
LDATA13: CON2.31 J1.27 | length 74.1
  Bottom Layer w0.15: CON2.31@-159.8,-41.5 -155.6,-41.5 -155.294,-41.194 -137.106,-41.194 -116.14,-62.16 J1.27@-106.841,-62.16 ; CON2.31@-159.535,-41.765 cw(c-158.895,-42.405) -158.895,-41.5 cw(c-158.895,-40.595) CON2.31@-159.535,-41.235 ; CON2.31@-159.429,-41.871 cw(c-158.533,-42.767) -158.533,-41.5 cw(c-158.533,-40.233) CON2.31@-159.429,-41.129 ; -107.625,-62.16 cw(c-107.625,-62.944) J1.27@-107.071,-62.39 ; -107.625,-62.16 ccw(c-107.625,-61.375) J1.27@-107.071,-61.93 ; -107.625,-62.16 cw(c-107.625,-62.944) J1.27@-107.071,-62.39 ; -107.625,-62.16 ccw(c-107.625,-61.375) J1.27@-107.071,-61.93 ; -107.625,-62.16 cw(c-107.625,-62.944) J1.27@-107.071,-62.39 ; -107.625,-62.16 ccw(c-107.625,-61.375) J1.27@-107.071,-61.93 ; J1.27@-107.263,-62.16 cw(c-107.263,-62.582) J1.27@-106.965,-62.284 ; J1.27@-107.263,-62.16 ccw(c-107.263,-61.737) J1.27@-106.965,-62.036 ; J1.27@-107.263,-62.16 cw(c-107.263,-62.582) J1.27@-106.965,-62.284 ; J1.27@-107.263,-62.16 ccw(c-107.263,-61.737) J1.27@-106.965,-62.036 ; J1.27@-107.263,-62.16 cw(c-107.263,-62.582) J1.27@-106.965,-62.284 ; J1.27@-107.263,-62.16 ccw(c-107.263,-61.737) J1.27@-106.965,-62.036 ; -107.701,-62.16 ccw(c-107.701,-61.34) -107.121,-61.92 cw(c-107.701,-61.34) -107.701,-62.16 ; -107.65,-62.16 cw(c-107.65,-62.909) -107.121,-62.379 ccw(c-107.65,-62.909) -107.65,-62.16 ; -107.339,-62.16 ccw(c-107.339,-61.702) -107.015,-62.026 cw(c-107.339,-61.702) -107.339,-62.16
LDATA14: CON2.28 J1.30 | length 74.8
  Bottom Layer w0.15: CON2.28@-161.795,-45.275 ccw(c-161.771,-44.319) -161.095,-44.995 ; CON2.28@-161.791,-45.125 ccw(c-161.76,-43.835) -160.848,-44.748 ; CON2.28@-161.787,-44.975 ccw(c-161.748,-43.352) -160.6,-44.5 ; CON2.28@-161.7,-45.6 -160.6,-44.5 ; CON2.28@-161.275,-45.5 cw(c-160.49,-45.5) -161.045,-44.945 ; J1.30@-105.957,-63.431 J1.30@-105.571,-63.431 ; J1.30@-105.571,-63.419 -106.207,-64.056 -116.044,-64.056 -136.926,-43.174 -154.474,-43.174 -155.8,-44.5 -160.6,-44.5 ; J1.30@-106.014,-63.488 cw(c-105.574,-63.928) J1.30@-105.57,-63.306 ; J1.30@-106.014,-63.488 cw(c-105.574,-63.928) J1.30@-105.57,-63.306 ; J1.30@-106.014,-63.488 cw(c-105.574,-63.928) J1.30@-105.57,-63.306 ; -106.182,-64.031 ccw(c-106.754,-63.459) -105.946,-63.431 cw(c-106.754,-63.459) -106.182,-64.031 ; -106.09,-63.939 cw(c-105.621,-64.408) -105.621,-63.744 ccw(c-105.621,-64.408) -106.09,-63.939 ; -105.938,-63.787 ccw(c-106.282,-63.442) -105.796,-63.425 cw(c-106.282,-63.442) -105.938,-63.787
LDATA15: CON2.29 J1.29 | length 74.3
  Bottom Layer w0.15: CON2.29@-159.8,-43.5 -155.8,-43.5 -154.838,-42.538 -136.962,-42.538 -116.069,-63.431 J1.29@-106.841,-63.431 ; CON2.29@-159.535,-43.765 cw(c-158.895,-44.405) -158.895,-43.5 cw(c-158.895,-42.595) CON2.29@-159.535,-43.235 ; CON2.29@-159.429,-43.871 cw(c-158.533,-44.767) -158.533,-43.5 cw(c-158.533,-42.233) CON2.29@-159.429,-43.129 ; -107.625,-63.431 cw(c-107.625,-64.215) J1.29@-107.071,-63.661 ; -107.625,-63.431 ccw(c-107.625,-62.646) J1.29@-107.071,-63.201 ; -107.625,-63.431 cw(c-107.625,-64.215) J1.29@-107.071,-63.661 ; -107.625,-63.431 ccw(c-107.625,-62.646) J1.29@-107.071,-63.201 ; -107.625,-63.431 cw(c-107.625,-64.215) J1.29@-107.071,-63.661 ; -107.625,-63.431 ccw(c-107.625,-62.646) J1.29@-107.071,-63.201 ; J1.29@-107.263,-63.431 cw(c-107.263,-63.853) J1.29@-106.965,-63.554 ; J1.29@-107.263,-63.431 ccw(c-107.263,-63.008) J1.29@-106.965,-63.307 ; J1.29@-107.263,-63.431 cw(c-107.263,-63.853) J1.29@-106.965,-63.554 ; J1.29@-107.263,-63.431 ccw(c-107.263,-63.008) J1.29@-106.965,-63.307 ; J1.29@-107.263,-63.431 cw(c-107.263,-63.853) J1.29@-106.965,-63.554 ; J1.29@-107.263,-63.431 ccw(c-107.263,-63.008) J1.29@-106.965,-63.307 ; -107.703,-63.431 ccw(c-107.703,-62.607) -107.121,-63.19 cw(c-107.703,-62.607) -107.703,-63.431 ; -107.648,-63.431 cw(c-107.648,-64.177) -107.121,-63.649 ccw(c-107.648,-64.177) -107.648,-63.431 ; -107.341,-63.431 ccw(c-107.341,-62.97) -107.015,-63.296 cw(c-107.341,-62.97) -107.341,-63.431
LINEOUT_L: C9.1 J1.3 | length 64.4
  Top Layer w0.15: C9.1@-126.096,-28.219 -126.096,-29.304 ; v1@-109.688,-30.788 ccw(c-109.902,-31.002) -109.902,-30.7 ccw(c-109.902,-30.398) v1@-109.688,-30.612 ; v1(-109.6,-30.7) -124.7,-30.7 -126.096,-29.304 ; C9.1@-126.407,-28.692 cw(c-126.854,-29.303) -126.096,-29.303 ; C9.1@-126.407,-28.692 cw(c-126.854,-29.303) -126.096,-29.303 ; C9.1@-126.407,-28.692 cw(c-126.854,-29.303) -126.096,-29.303 ; C9.1@-126.407,-28.692 cw(c-126.854,-29.303) -126.096,-29.303 ; C9.1@-126.407,-28.692 cw(c-126.854,-29.303) -126.096,-29.303 ; C9.1@-126.318,-28.571 cw(c-126.637,-29.008) -126.096,-29.008 ; C9.1@-126.318,-28.571 cw(c-126.637,-29.008) -126.096,-29.008 ; C9.1@-126.318,-28.571 cw(c-126.637,-29.008) -126.096,-29.008 ; C9.1@-126.318,-28.571 cw(c-126.637,-29.008) -126.096,-29.008 ; C9.1@-126.318,-28.571 cw(c-126.637,-29.008) -126.096,-29.008 ; -126.096,-29.303 cw(c-125.339,-29.303) C9.1@-125.786,-28.692 ; -126.096,-29.303 cw(c-125.339,-29.303) C9.1@-125.786,-28.692 ; -126.096,-29.303 cw(c-125.339,-29.303) C9.1@-125.786,-28.692 ; -126.096,-29.303 cw(c-125.339,-29.303) C9.1@-125.786,-28.692 ; -126.096,-29.303 cw(c-125.339,-29.303) C9.1@-125.786,-28.692 ; -126.096,-29.008 cw(c-125.556,-29.008) C9.1@-125.875,-28.571 ; -126.096,-29.008 cw(c-125.556,-29.008) C9.1@-125.875,-28.571 ; -126.096,-29.008 cw(c-125.556,-29.008) C9.1@-125.875,-28.571 ; -126.096,-29.008 cw(c-125.556,-29.008) C9.1@-125.875,-28.571 ; -126.096,-29.008 cw(c-125.556,-29.008) C9.1@-125.875,-28.571 ; -110.022,-30.7 cw(c-110.022,-31.122) v1@-109.724,-30.824 ; -110.022,-30.7 ccw(c-110.022,-30.278) v1@-109.724,-30.576 ; -110.022,-30.7 cw(c-110.022,-31.122) v1@-109.724,-30.824 ; -110.022,-30.7 ccw(c-110.022,-30.278) v1@-109.724,-30.576 ; -110.022,-30.7 cw(c-110.022,-31.122) v1@-109.724,-30.824 ; -110.022,-30.7 ccw(c-110.022,-30.278) v1@-109.724,-30.576 ; -110.022,-30.7 ccw(c-110.022,-30.278) v1@-109.724,-30.576 ; -110.022,-30.7 cw(c-110.022,-31.122) v1@-109.724,-30.824
  Bottom Layer w0.15: v1@-109.688,-30.788 cw(c-109.902,-31.002) -109.6,-31.002 cw(c-109.298,-31.002) v1@-109.512,-30.788 ; v1(-109.6,-30.7) -109.6,-45.8 -108.491,-46.909 J1.3@-106.841,-46.909 ; v1@-109.724,-30.824 cw(c-110.022,-31.122) -109.6,-31.122 ; v1@-109.724,-30.824 cw(c-110.022,-31.122) -109.6,-31.122 ; v1@-109.724,-30.824 cw(c-110.022,-31.122) -109.6,-31.122 ; v1@-109.724,-30.824 cw(c-110.022,-31.122) -109.6,-31.122 ; -109.6,-31.122 cw(c-109.178,-31.122) v1@-109.476,-30.824 ; -109.6,-31.122 cw(c-109.178,-31.122) v1@-109.476,-30.824 ; -109.6,-31.122 cw(c-109.178,-31.122) v1@-109.476,-30.824 ; -109.6,-31.122 cw(c-109.178,-31.122) v1@-109.476,-30.824 ; -107.625,-46.909 cw(c-107.625,-47.694) J1.3@-107.071,-47.139 ; -107.625,-46.909 ccw(c-107.625,-46.125) J1.3@-107.071,-46.679 ; -107.625,-46.909 cw(c-107.625,-47.694) J1.3@-107.071,-47.139 ; -107.625,-46.909 ccw(c-107.625,-46.125) J1.3@-107.071,-46.679 ; -107.625,-46.909 cw(c-107.625,-47.694) J1.3@-107.071,-47.139 ; -107.625,-46.909 ccw(c-107.625,-46.125) J1.3@-107.071,-46.679 ; J1.3@-107.263,-46.909 cw(c-107.263,-47.332) J1.3@-106.965,-47.033 ; J1.3@-107.263,-46.909 ccw(c-107.263,-46.487) J1.3@-106.965,-46.786 ; J1.3@-107.263,-46.909 cw(c-107.263,-47.332) J1.3@-106.965,-47.033 ; J1.3@-107.263,-46.909 ccw(c-107.263,-46.487) J1.3@-106.965,-46.786 ; J1.3@-107.263,-46.909 cw(c-107.263,-47.332) J1.3@-106.965,-47.033 ; J1.3@-107.263,-46.909 ccw(c-107.263,-46.487) J1.3@-106.965,-46.786 ; -107.676,-46.909 cw(c-107.676,-47.694) -107.121,-47.139 ccw(c-107.676,-47.694) -107.676,-46.909 ; -107.675,-46.909 ccw(c-107.675,-46.125) -107.121,-46.68 cw(c-107.675,-46.125) -107.675,-46.909 ; -107.314,-46.909 cw(c-107.314,-47.332) -107.015,-47.033 ccw(c-107.314,-47.332) -107.314,-46.909 ; -107.313,-46.909 ccw(c-107.313,-46.487) -107.015,-46.786 cw(c-107.313,-46.487) -107.313,-46.909
LINEOUT_R: C10.1 J1.4 | length 59.9
  Top Layer w0.15: C10.1@-120.397,-28.219 -120.397,-29.303 ; v1@-108.988,-29.988 ccw(c-109.202,-30.202) -109.202,-29.9 ccw(c-109.202,-29.598) v1@-108.988,-29.812 ; v1(-108.9,-29.9) -119.8,-29.9 -120.397,-29.303 ; C10.1@-120.707,-28.692 cw(c-121.154,-29.303) -120.397,-29.303 ; C10.1@-120.707,-28.692 cw(c-121.154,-29.303) -120.397,-29.303 ; C10.1@-120.707,-28.692 cw(c-121.154,-29.303) -120.397,-29.303 ; C10.1@-120.707,-28.692 cw(c-121.154,-29.303) -120.397,-29.303 ; C10.1@-120.707,-28.692 cw(c-121.154,-29.303) -120.397,-29.303 ; C10.1@-120.618,-28.571 cw(c-120.937,-29.008) -120.397,-29.008 ; C10.1@-120.618,-28.571 cw(c-120.937,-29.008) -120.397,-29.008 ; C10.1@-120.618,-28.571 cw(c-120.937,-29.008) -120.397,-29.008 ; C10.1@-120.618,-28.571 cw(c-120.937,-29.008) -120.397,-29.008 ; C10.1@-120.618,-28.571 cw(c-120.937,-29.008) -120.397,-29.008 ; -120.397,-29.303 cw(c-119.639,-29.303) C10.1@-120.086,-28.692 ; -120.397,-29.303 cw(c-119.639,-29.303) C10.1@-120.086,-28.692 ; -120.397,-29.303 cw(c-119.639,-29.303) C10.1@-120.086,-28.692 ; -120.397,-29.303 cw(c-119.639,-29.303) C10.1@-120.086,-28.692 ; -120.397,-29.303 cw(c-119.639,-29.303) C10.1@-120.086,-28.692 ; -120.397,-29.008 cw(c-119.856,-29.008) C10.1@-120.175,-28.571 ; -120.397,-29.008 cw(c-119.856,-29.008) C10.1@-120.175,-28.571 ; -120.397,-29.008 cw(c-119.856,-29.008) C10.1@-120.175,-28.571 ; -120.397,-29.008 cw(c-119.856,-29.008) C10.1@-120.175,-28.571 ; -120.397,-29.008 cw(c-119.856,-29.008) C10.1@-120.175,-28.571 ; -109.322,-29.9 cw(c-109.322,-30.322) v1@-109.024,-30.024 ; -109.322,-29.9 ccw(c-109.322,-29.478) v1@-109.024,-29.776 ; -109.322,-29.9 cw(c-109.322,-30.322) v1@-109.024,-30.024 ; -109.322,-29.9 ccw(c-109.322,-29.478) v1@-109.024,-29.776 ; -109.322,-29.9 cw(c-109.322,-30.322) v1@-109.024,-30.024 ; -109.322,-29.9 ccw(c-109.322,-29.478) v1@-109.024,-29.776 ; -109.322,-29.9 ccw(c-109.322,-29.478) v1@-109.024,-29.776 ; -109.322,-29.9 cw(c-109.322,-30.322) v1@-109.024,-30.024
  Bottom Layer w0.15: v1@-108.988,-29.988 cw(c-109.202,-30.202) -108.9,-30.202 cw(c-108.598,-30.202) v1@-108.812,-29.988 ; v1(-108.9,-29.9) -108.9,-45.7 -108.316,-46.284 -106.196,-46.284 J1.4@-105.571,-46.909 ; v1@-109.024,-30.024 cw(c-109.322,-30.322) -108.9,-30.322 ; v1@-109.024,-30.024 cw(c-109.322,-30.322) -108.9,-30.322 ; v1@-109.024,-30.024 cw(c-109.322,-30.322) -108.9,-30.322 ; v1@-109.024,-30.024 cw(c-109.322,-30.322) -108.9,-30.322 ; -108.9,-30.322 cw(c-108.478,-30.322) v1@-108.776,-30.024 ; -108.9,-30.322 cw(c-108.478,-30.322) v1@-108.776,-30.024 ; -108.9,-30.322 cw(c-108.478,-30.322) v1@-108.776,-30.024 ; -108.9,-30.322 cw(c-108.478,-30.322) v1@-108.776,-30.024 ; -106.126,-46.354 cw(c-106.68,-46.909) J1.4@-105.896,-46.909 ; -106.126,-46.354 ccw(c-105.571,-45.8) J1.4@-105.571,-46.584 ; -106.126,-46.354 cw(c-106.68,-46.909) J1.4@-105.896,-46.909 ; -106.126,-46.354 ccw(c-105.571,-45.8) J1.4@-105.571,-46.584 ; -106.126,-46.354 cw(c-106.68,-46.909) J1.4@-105.896,-46.909 ; -106.126,-46.354 ccw(c-105.571,-45.8) J1.4@-105.571,-46.584 ; J1.4@-105.87,-46.611 cw(c-106.168,-46.909) J1.4@-105.746,-46.909 ; J1.4@-105.87,-46.611 ccw(c-105.571,-46.312) J1.4@-105.571,-46.734 ; J1.4@-105.87,-46.611 cw(c-106.168,-46.909) J1.4@-105.746,-46.909 ; J1.4@-105.87,-46.611 ccw(c-105.571,-46.312) J1.4@-105.571,-46.734 ; J1.4@-105.87,-46.611 cw(c-106.168,-46.909) J1.4@-105.746,-46.909 ; J1.4@-105.87,-46.611 ccw(c-105.571,-46.312) J1.4@-105.571,-46.734 ; -106.211,-46.269 cw(c-106.851,-46.909) -105.946,-46.909 ccw(c-106.851,-46.909) -106.211,-46.269 ; -106.09,-46.39 ccw(c-105.621,-45.921) -105.621,-46.584 cw(c-105.621,-45.921) -106.09,-46.39 ; -105.955,-46.525 cw(c-106.339,-46.909) -105.796,-46.909 ccw(c-106.339,-46.909) -105.955,-46.525
LNGCS1: CON2.8
LNGCS2: CON2.12
LNOE: CON2.44 J1.14 | length 79.7
  Bottom Layer w0.15: CON2.44@-161.8,-29.5 -160.8,-28.5 -158.3,-28.5 -153.7,-33.1 -137.2,-33.1 -116.4,-53.9 -106.207,-53.9 J1.14@-105.571,-53.264 ; CON2.44@-161.8,-29.125 ccw(c-161.8,-28.22) -161.16,-28.86 ccw(c-160.52,-29.5) CON2.44@-161.425,-29.5 ; CON2.44@-161.8,-28.975 ccw(c-161.8,-27.708) -160.904,-28.604 ccw(c-160.008,-29.5) CON2.44@-161.275,-29.5 ; -106.126,-53.818 cw(c-105.571,-54.373) J1.14@-105.571,-53.589 ; -106.126,-53.818 ccw(c-106.68,-53.264) J1.14@-105.896,-53.264 ; -106.126,-53.818 cw(c-105.571,-54.373) J1.14@-105.571,-53.589 ; -106.126,-53.818 ccw(c-106.68,-53.264) J1.14@-105.896,-53.264 ; -106.126,-53.818 cw(c-105.571,-54.373) J1.14@-105.571,-53.589 ; -106.126,-53.818 ccw(c-106.68,-53.264) J1.14@-105.896,-53.264 ; J1.14@-105.87,-53.562 cw(c-105.571,-53.861) J1.14@-105.571,-53.439 ; J1.14@-105.87,-53.562 ccw(c-106.168,-53.264) J1.14@-105.746,-53.264 ; J1.14@-105.87,-53.562 cw(c-105.571,-53.861) J1.14@-105.571,-53.439 ; J1.14@-105.87,-53.562 ccw(c-106.168,-53.264) J1.14@-105.746,-53.264 ; J1.14@-105.87,-53.562 cw(c-105.571,-53.861) J1.14@-105.571,-53.439 ; J1.14@-105.87,-53.562 ccw(c-106.168,-53.264) J1.14@-105.746,-53.264 ; -106.18,-53.873 ccw(c-106.748,-53.305) -105.946,-53.273 cw(c-106.748,-53.305) -106.18,-53.873 ; -106.083,-53.776 cw(c-105.621,-54.238) -105.621,-53.584 ccw(c-105.621,-54.238) -106.083,-53.776 ; -105.938,-53.631 ccw(c-106.282,-53.286) -105.796,-53.267 cw(c-106.282,-53.286) -105.938,-53.631
LNWE: CON2.45 J1.13 | length 76.5
  Bottom Layer w0.15: CON2.45@-159.8,-27.5 -158.4,-27.5 -153.3,-32.6 -137.1,-32.6 -116.436,-53.264 J1.13@-106.841,-53.264 ; CON2.45@-159.535,-27.765 cw(c-158.895,-28.405) -158.895,-27.5 cw(c-158.895,-26.595) CON2.45@-159.535,-27.235 ; CON2.45@-159.429,-27.871 cw(c-158.533,-28.767) -158.533,-27.5 cw(c-158.533,-26.233) CON2.45@-159.429,-27.129 ; -107.625,-53.264 cw(c-107.625,-54.048) J1.13@-107.071,-53.493 ; -107.625,-53.264 ccw(c-107.625,-52.479) J1.13@-107.071,-53.034 ; -107.625,-53.264 cw(c-107.625,-54.048) J1.13@-107.071,-53.493 ; -107.625,-53.264 ccw(c-107.625,-52.479) J1.13@-107.071,-53.034 ; -107.625,-53.264 cw(c-107.625,-54.048) J1.13@-107.071,-53.493 ; -107.625,-53.264 ccw(c-107.625,-52.479) J1.13@-107.071,-53.034 ; J1.13@-107.263,-53.264 cw(c-107.263,-53.686) J1.13@-106.965,-53.387 ; J1.13@-107.263,-53.264 ccw(c-107.263,-52.841) J1.13@-106.965,-53.14 ; J1.13@-107.263,-53.264 cw(c-107.263,-53.686) J1.13@-106.965,-53.387 ; J1.13@-107.263,-53.264 ccw(c-107.263,-52.841) J1.13@-106.965,-53.14 ; J1.13@-107.263,-53.264 cw(c-107.263,-53.686) J1.13@-106.965,-53.387 ; J1.13@-107.263,-53.264 ccw(c-107.263,-52.841) J1.13@-106.965,-53.14 ; -107.686,-53.264 ccw(c-107.686,-52.464) -107.121,-53.03 cw(c-107.686,-52.464) -107.686,-53.264 ; -107.665,-53.264 cw(c-107.665,-54.034) -107.121,-53.489 ccw(c-107.665,-54.034) -107.665,-53.264 ; -107.324,-53.264 ccw(c-107.324,-52.827) -107.015,-53.136 cw(c-107.324,-52.827) -107.324,-53.264 ; -107.303,-53.264 cw(c-107.303,-53.672) -107.015,-53.383 ccw(c-107.303,-53.672) -107.303,-53.264
MIC2_IN: C5.2 MIC1.1 R3.2 | length 67
  Top Layer w0.15: MIC1.1@-159.6,-11.425 -159.6,-13.3 -159.518,-13.382 C5.2@-159.518,-16.381 -159.518,-17.882 -158.64,-18.76 R3.2@-156.337,-18.76 ; MIC1.1@-159.971,-11.796 cw(c-160.867,-12.692) -159.6,-12.692 ; MIC1.1@-159.971,-11.796 cw(c-160.867,-12.692) -159.6,-12.692 ; MIC1.1@-159.971,-11.796 cw(c-160.867,-12.692) -159.6,-12.692 ; MIC1.1@-159.971,-11.796 cw(c-160.867,-12.692) -159.6,-12.692 ; MIC1.1@-159.971,-11.796 cw(c-160.867,-12.692) -159.6,-12.692 ; C5.2@-159.889,-16.803 cw(c-160.785,-17.699) -159.518,-17.699 ; C5.2@-159.889,-16.803 cw(c-160.785,-17.699) -159.518,-17.699 ; C5.2@-159.889,-16.803 cw(c-160.785,-17.699) -159.518,-17.699 ; C5.2@-159.889,-16.803 cw(c-160.785,-17.699) -159.518,-17.699 ; C5.2@-159.889,-16.803 cw(c-160.785,-17.699) -159.518,-17.699 ; C5.2@-159.889,-15.96 ccw(c-160.785,-15.064) -159.518,-15.064 ; C5.2@-159.889,-15.96 ccw(c-160.785,-15.064) -159.518,-15.064 ; C5.2@-159.889,-15.96 ccw(c-160.785,-15.064) -159.518,-15.064 ; C5.2@-159.889,-15.96 ccw(c-160.785,-15.064) -159.518,-15.064 ; C5.2@-159.889,-15.96 ccw(c-160.785,-15.064) -159.518,-15.064 ; MIC1.1@-159.865,-11.69 cw(c-160.505,-12.33) -159.6,-12.33 ; MIC1.1@-159.865,-11.69 cw(c-160.505,-12.33) -159.6,-12.33 ; MIC1.1@-159.865,-11.69 cw(c-160.505,-12.33) -159.6,-12.33 ; MIC1.1@-159.865,-11.69 cw(c-160.505,-12.33) -159.6,-12.33 ; MIC1.1@-159.865,-11.69 cw(c-160.505,-12.33) -159.6,-12.33 ; C5.2@-159.783,-16.697 cw(c-160.423,-17.337) -159.518,-17.337 ; C5.2@-159.783,-16.697 cw(c-160.423,-17.337) -159.518,-17.337 ; C5.2@-159.783,-16.697 cw(c-160.423,-17.337) -159.518,-17.337 ; C5.2@-159.783,-16.697 cw(c-160.423,-17.337) -159.518,-17.337 ; C5.2@-159.783,-16.697 cw(c-160.423,-17.337) -159.518,-17.337 ; C5.2@-159.783,-16.066 ccw(c-160.423,-15.426) -159.518,-15.426 ; C5.2@-159.783,-16.066 ccw(c-160.423,-15.426) -159.518,-15.426 ; C5.2@-159.783,-16.066 ccw(c-160.423,-15.426) -159.518,-15.426 ; C5.2@-159.783,-16.066 ccw(c-160.423,-15.426) -159.518,-15.426 ; C5.2@-159.783,-16.066 ccw(c-160.423,-15.426) -159.518,-15.426 ; -159.6,-12.692 cw(c-158.333,-12.692) MIC1.1@-159.229,-11.796 ; -159.6,-12.692 cw(c-158.333,-12.692) MIC1.1@-159.229,-11.796 ; -159.6,-12.692 cw(c-158.333,-12.692) MIC1.1@-159.229,-11.796 ; -159.6,-12.692 cw(c-158.333,-12.692) MIC1.1@-159.229,-11.796 ; -159.6,-12.692 cw(c-158.333,-12.692) MIC1.1@-159.229,-11.796 ; -159.6,-12.33 cw(c-158.695,-12.33) MIC1.1@-159.335,-11.69 ; -159.6,-12.33 cw(c-158.695,-12.33) MIC1.1@-159.335,-11.69 ; -159.6,-12.33 cw(c-158.695,-12.33) MIC1.1@-159.335,-11.69 ; -159.6,-12.33 cw(c-158.695,-12.33) MIC1.1@-159.335,-11.69 ; -159.6,-12.33 cw(c-158.695,-12.33) MIC1.1@-159.335,-11.69 ; -159.518,-17.699 cw(c-158.25,-17.699) C5.2@-159.146,-16.803 ; -159.518,-17.699 cw(c-158.25,-17.699) C5.2@-159.146,-16.803 ; -159.518,-17.699 cw(c-158.25,-17.699) C5.2@-159.146,-16.803 ; -159.518,-17.699 cw(c-158.25,-17.699) C5.2@-159.146,-16.803 ; -159.518,-17.699 cw(c-158.25,-17.699) C5.2@-159.146,-16.803 ; -159.518,-17.337 cw(c-158.612,-17.337) C5.2@-159.252,-16.697 ; -159.518,-17.337 cw(c-158.612,-17.337) C5.2@-159.252,-16.697 ; -159.518,-17.337 cw(c-158.612,-17.337) C5.2@-159.252,-16.697 ; -159.518,-17.337 cw(c-158.612,-17.337) C5.2@-159.252,-16.697 ; -159.518,-17.337 cw(c-158.612,-17.337) C5.2@-159.252,-16.697 ; -159.518,-15.426 ccw(c-158.612,-15.426) C5.2@-159.252,-16.066 ; -159.518,-15.426 ccw(c-158.612,-15.426) C5.2@-159.252,-16.066 ; -159.518,-15.426 ccw(c-158.612,-15.426) C5.2@-159.252,-16.066 ; -159.518,-15.426 ccw(c-158.612,-15.426) C5.2@-159.252,-16.066 ; -159.518,-15.426 ccw(c-158.612,-15.426) C5.2@-159.252,-16.066 ; -159.518,-15.064 ccw(c-158.25,-15.064) C5.2@-159.146,-15.96 ; -159.518,-15.064 ccw(c-158.25,-15.064) C5.2@-159.146,-15.96 ; -159.518,-15.064 ccw(c-158.25,-15.064) C5.2@-159.146,-15.96 ; -159.518,-15.064 ccw(c-158.25,-15.064) C5.2@-159.146,-15.96 ; -159.518,-15.064 ccw(c-158.25,-15.064) C5.2@-159.146,-15.96 ; -157.075,-18.76 cw(c-157.075,-19.498) R3.2@-156.553,-18.976 ; -157.075,-18.76 ccw(c-157.075,-18.021) R3.2@-156.553,-18.543 ; -157.075,-18.76 cw(c-157.075,-19.498) R3.2@-156.553,-18.976 ; -157.075,-18.76 ccw(c-157.075,-18.021) R3.2@-156.553,-18.543 ; -157.075,-18.76 cw(c-157.075,-19.498) R3.2@-156.553,-18.976 ; -157.075,-18.76 ccw(c-157.075,-18.021) R3.2@-156.553,-18.543 ; -157.075,-18.76 cw(c-157.075,-19.498) R3.2@-156.553,-18.976 ; -157.075,-18.76 ccw(c-157.075,-18.021) R3.2@-156.553,-18.543 ; -157.075,-18.76 ccw(c-157.075,-18.021) R3.2@-156.553,-18.543 ; -157.075,-18.76 cw(c-157.075,-19.498) R3.2@-156.553,-18.976